# Altium PCB LRA_Driver.PcbDoc
Units mm, origin at the board's own origin, x right, y up, seen from the top; angles counter-clockwise.
Board outline 40 x 50 mm, 2 copper layers (Top Layer, Bottom Layer), stack 1.071 mm thick; 25 components, 19 nets, 108 pads, 18 vias.
Unrouted connection lines stored in the file: 2.
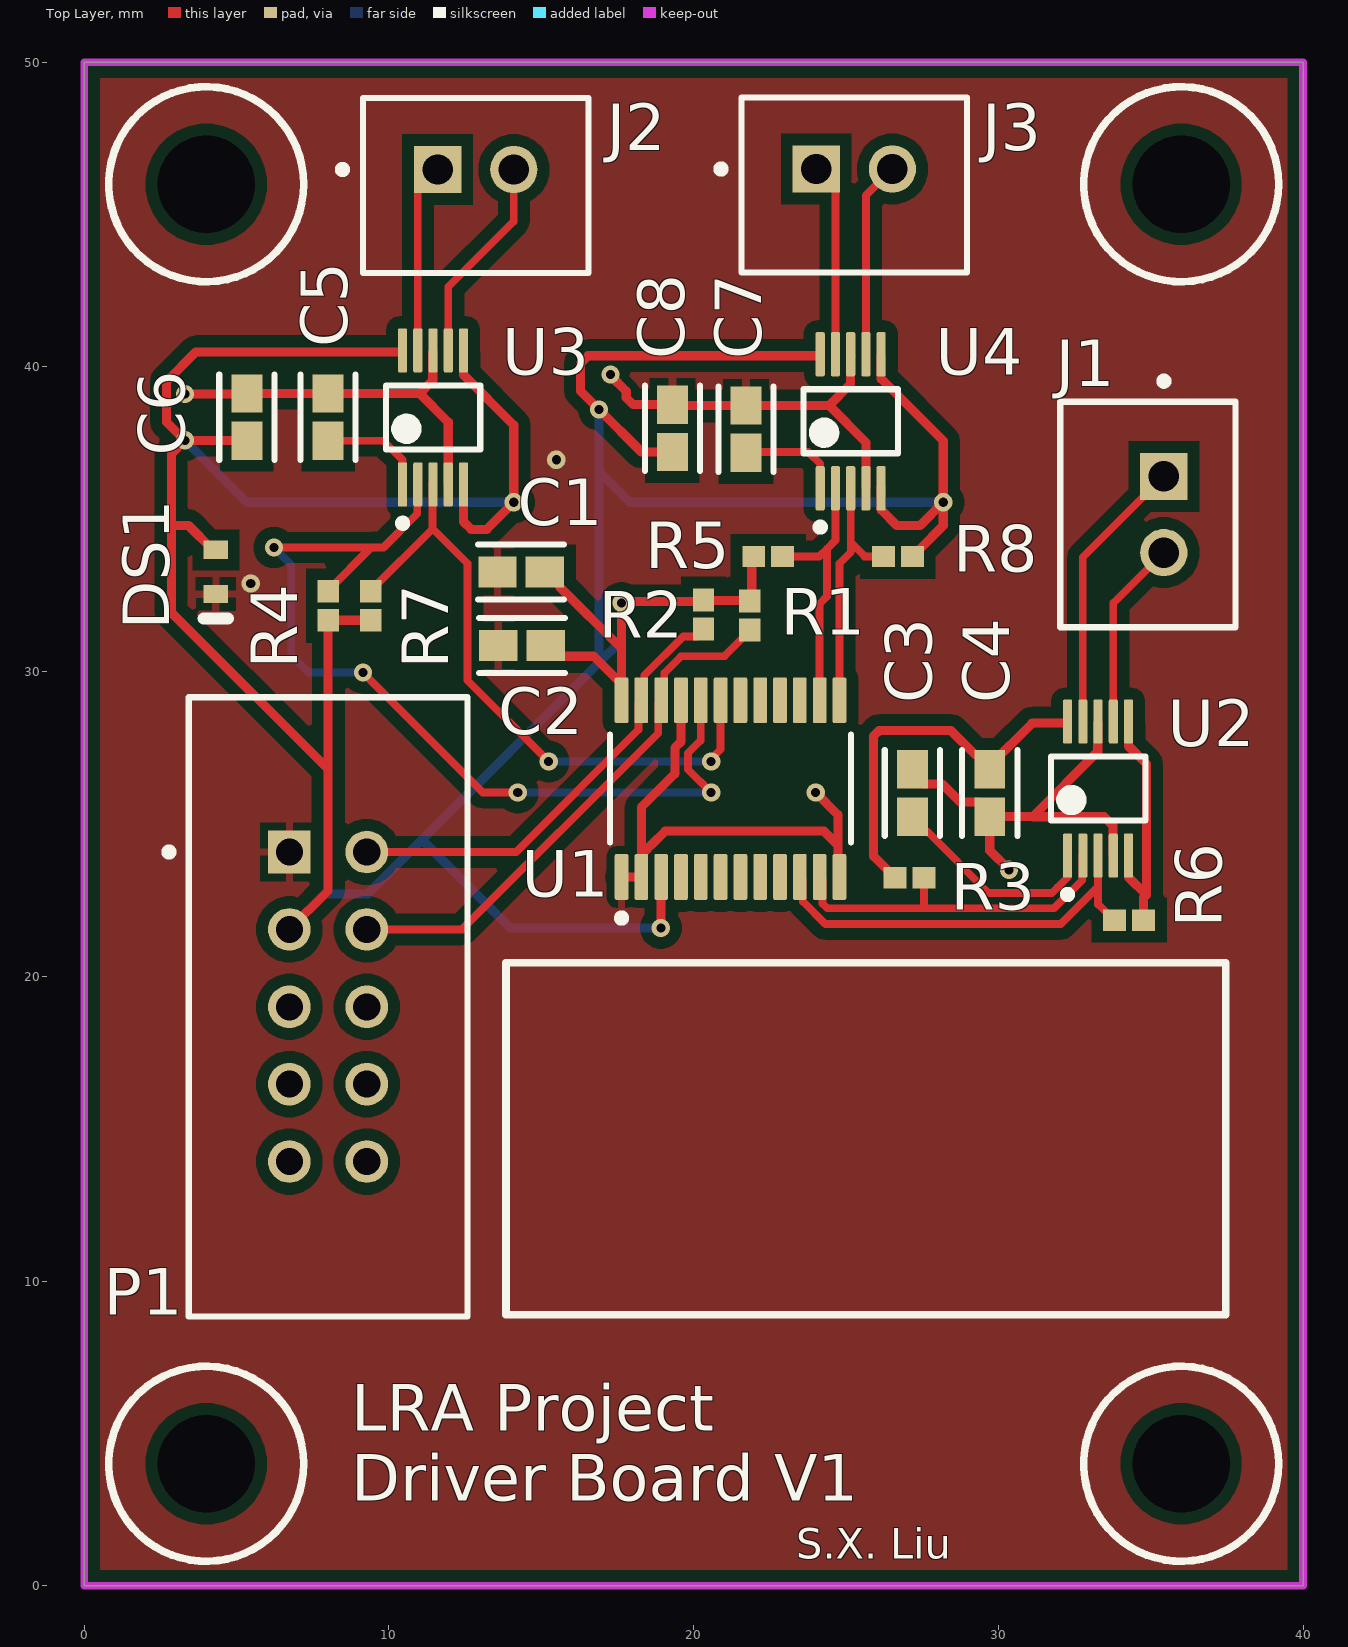
[diagram p0: Top Layer view]
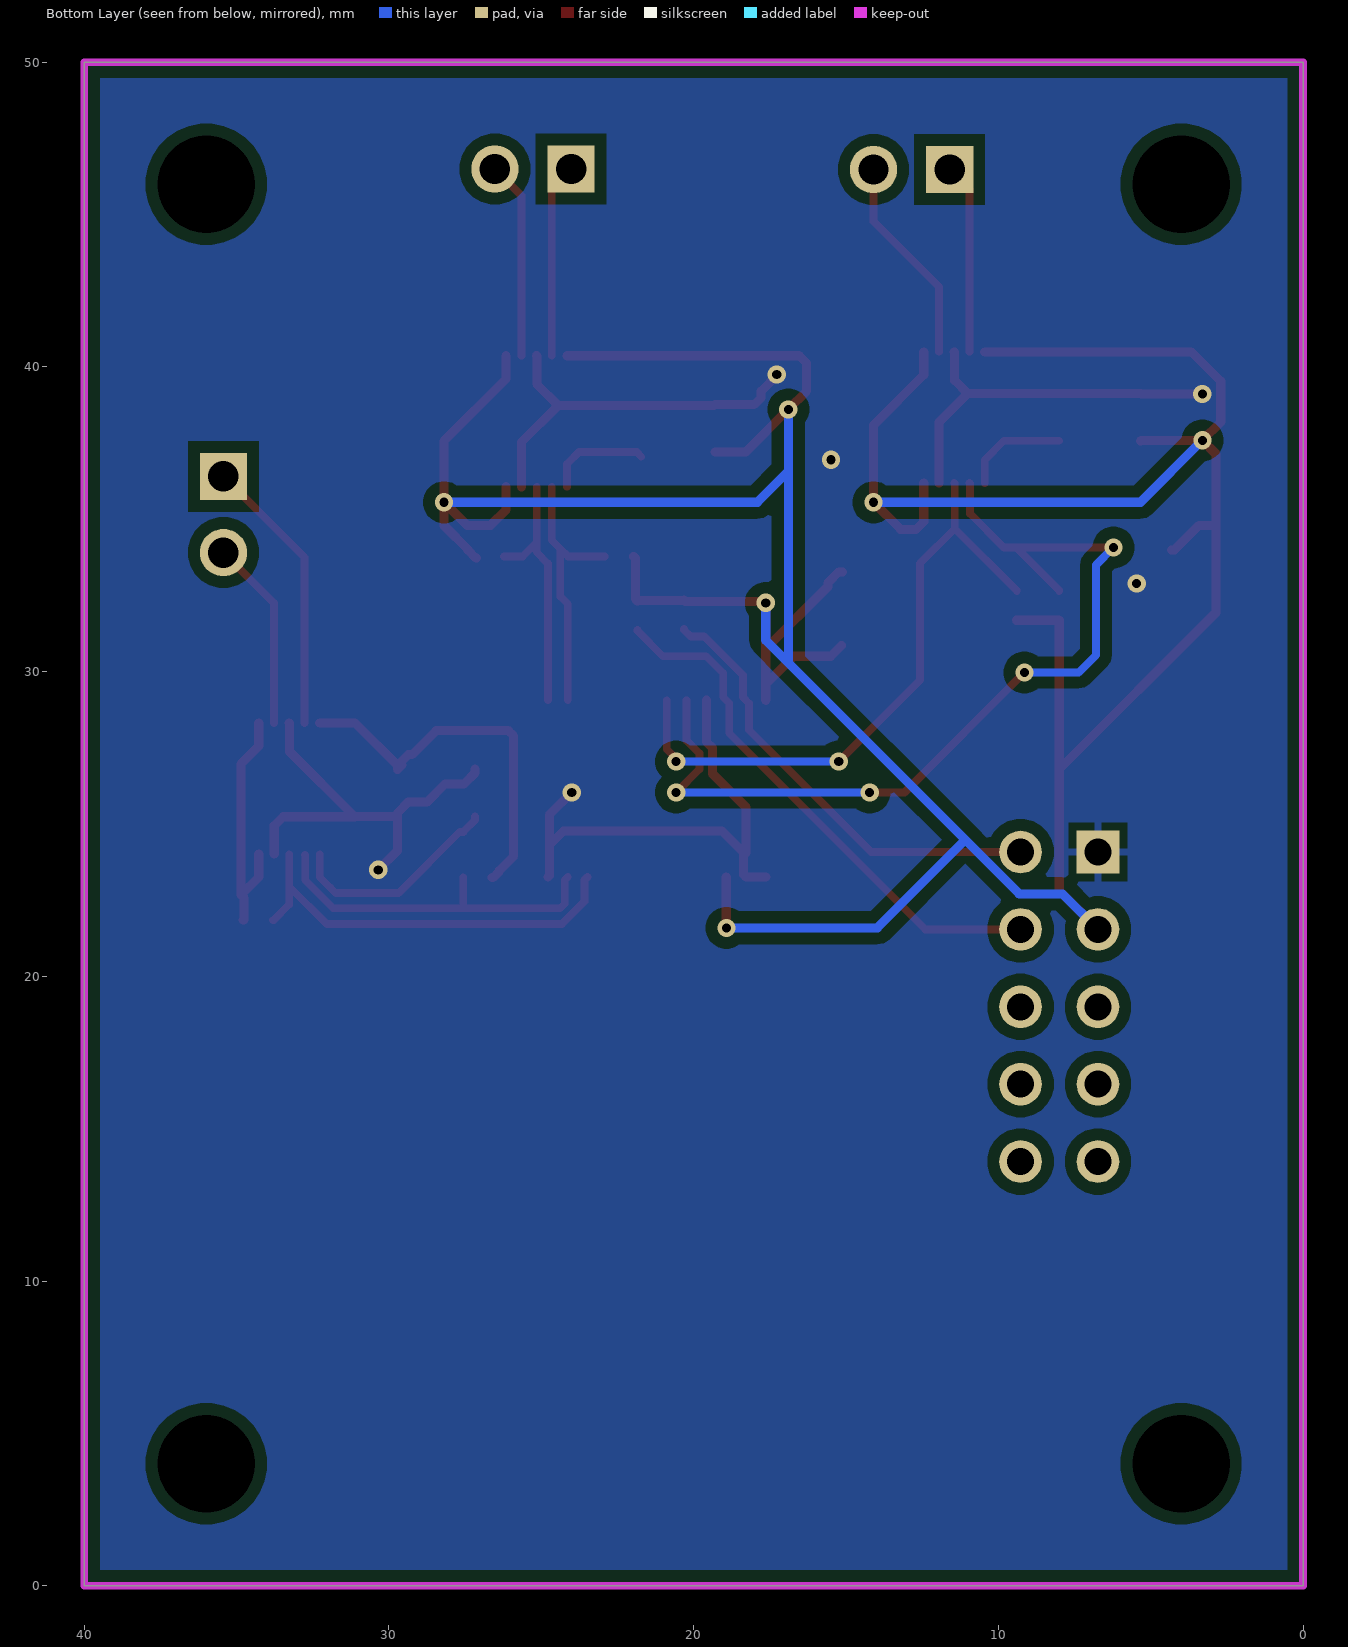
[diagram p1: Bottom Layer view, seen from below]
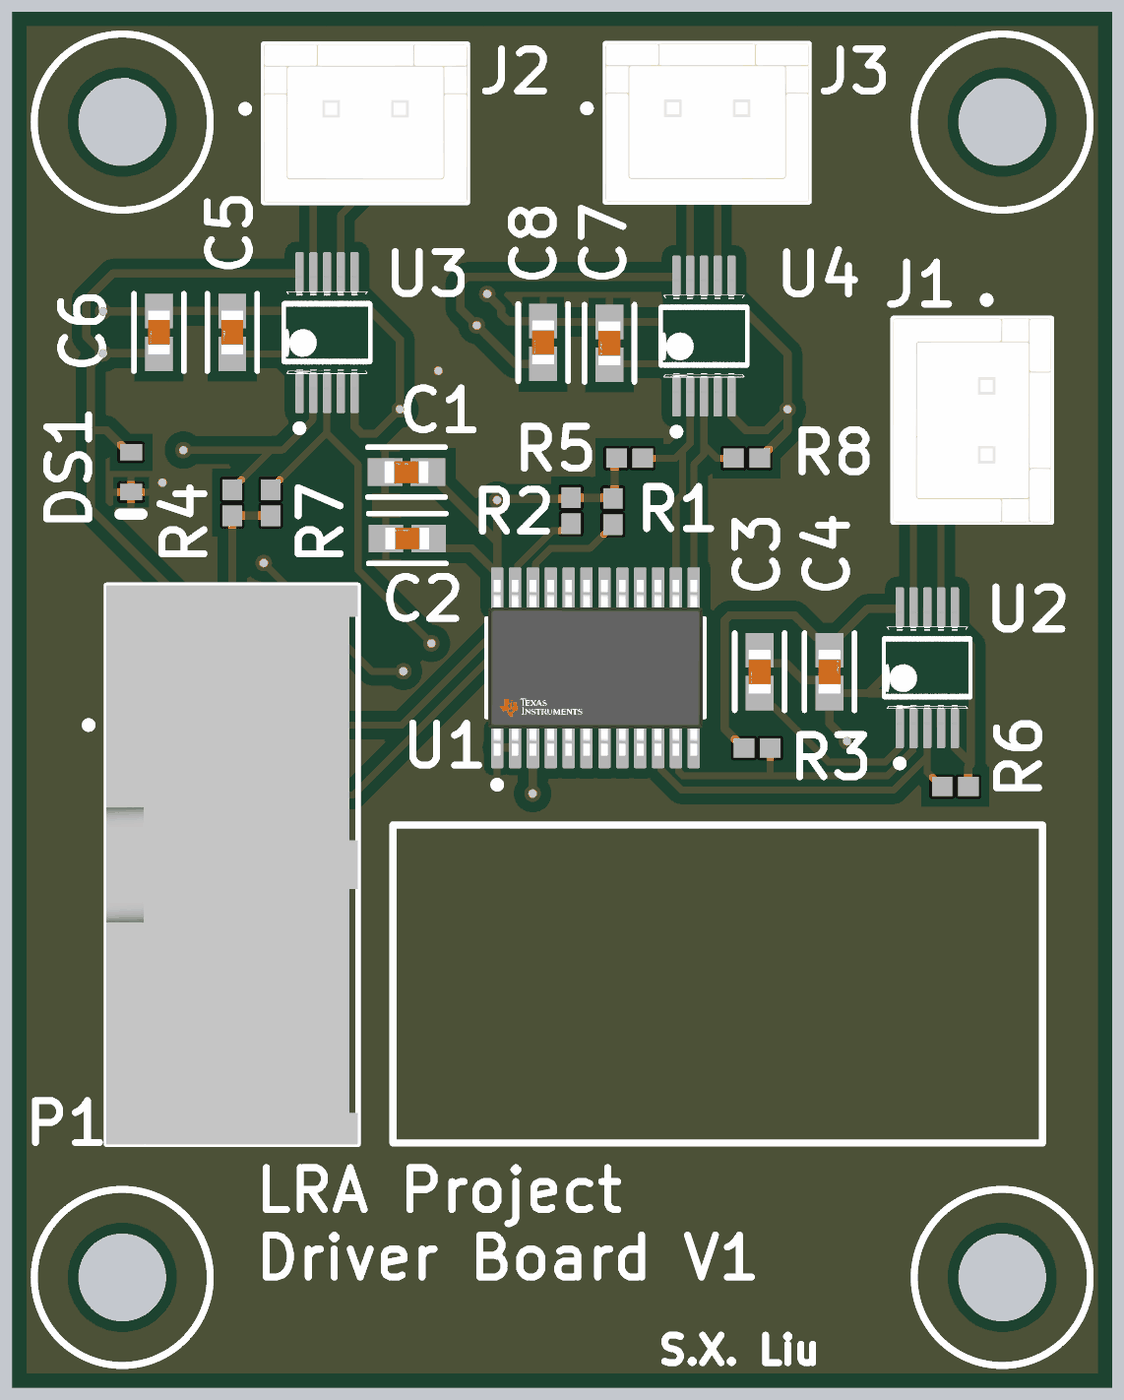
[diagram p2: 3D render of the assembled board from above, using the file's embedded part models]

## Layer stack, top to bottom
Top Solder: solder mask 0.0102, Solder Resist, Dk 3.5
Top Layer: signal copper 0.0356
Dielectric 1: dielectric 1, FR-4, Dk 4.8
Bottom Layer: signal copper 0.0356
Bottom Solder: solder mask 0.0102, Solder Resist, Dk 3.5

## Board outline
0,0 0,50 40,50 40,0

## Design rules (kind name [scope] priority, off if disabled: settings)
Clearance inploy&all [InPoly] p1: gap=0.381 ignorepadtopadclearanceinfootprint=FALSE
Clearance inpoly&isvia [InPoly vs IsVia] p2: gap=0.152 ignorepadtopadclearanceinfootprint=FALSE
Clearance inpoly&ispad [InPoly vs IsPad] p3: gap=0.152 ignorepadtopadclearanceinfootprint=FALSE
Clearance [All] p4: gap=0.152 ignorepadtopadclearanceinfootprint=FALSE
PolygonConnect PolygonConnect_vias [IsVia vs IsPoly] p1: connectstyle=Direct reliefconductorwidth=0.254 reliefentries=4 polygonreliefangle="90 Angle" airgapwidth=0.254
PolygonConnect [All] p2: connectstyle=Relief reliefconductorwidth=0.254 reliefentries=4 polygonreliefangle="90 Angle" airgapwidth=0.254
RoutingVias [All] p1: holewidth=0.3 width=0.6 viastyle="Through Hole" minholewidth=0.3 minwidth=0.6 maxholewidth=0.3 maxwidth=0.6
SolderMaskExpansion SolderMaskExpansion_vias [IsVia] p1: expansion=0.102 istentingtop=TRUE
SolderMaskExpansion [All] p2: expansion=0.102 istentingtop=FALSE
Width WidthPow [(InNet('VCC') OR InNet('GND'))] p1: maxlimit=0.3 minlimit=0.2 preferedwidth=0.3
Width [All] p2: maxlimit=0.254 minlimit=0.1 preferedwidth=0.254
30 further rules are at their usual default settings.

## Components (designator, comment, footprint, x,y, rotation, side; value= is the part's Value field where it differs from the comment)
C1 "10uF" FP-0603-L_1_6_0_1-W_0_8_0-IPC_A 14.336,33.274 r0 top
C2 "1uF" FP-0603-L_1_6_0_1-W_0_8_0-IPC_A 14.366,30.861 r0 top
C3 "1uF" FP-0603-L_1_6_0_1-W_0_8_0-IPC_A 27.178,26.02 r90 top
C4 "1uF" FP-0603-L_1_6_0_1-W_0_8_0-IPC_A 29.718,26.02 r270 top
C5 "1uF" FP-0603-L_1_6_0_1-W_0_8_0-IPC_A 8.001,38.354 r90 top
C6 "1uF" FP-0603-L_1_6_0_1-W_0_8_0-IPC_A 5.334,38.354 r90 top
C7 "1uF" FP-0603-L_1_6_0_1-W_0_8_0-IPC_A 21.717,37.958 r90 top
C8 "1uF" FP-0603-L_1_6_0_1-W_0_8_0-IPC_A 19.304,37.988 r90 top
DS1 "GTG1608SURC" VISH-TLMS1000_V 4.318,33.274 r270 top
J1 "B2B-XH-A(LF)(SN)" FP-B2B-XH-A_LF_SN-MFG 34.908,35.159 r270 top locked
J2 "B2B-XH-A(LF)(SN)" FP-B2B-XH-A_LF_SN-MFG 12.847,45.957 r0 top locked
J3 "B2B-XH-A(LF)(SN)" FP-B2B-XH-A_LF_SN-MFG 25.273,45.974 r0 top
P1 "5103309-1" TECO-5103309-1_V 8,19 r90 top
R1 "2kΩ" RESC1005X40X25ML10T10 21.844,31.844 r270 top
R2 "2kΩ" RESC1005X40X25ML10T10 20.32,31.877 r270 top
R3 "2kΩ" RESC1005X40X25ML10T10 27.084,23.241 r0 top
R4 "2kΩ" RESC1005X40X25ML10T10 8.001,32.164 r90 top
R5 "2kΩ" RESC1005X40X25ML10T10 22.446,33.782 r0 top
R6 "2kΩ" RESC1005X40X25ML10T10 34.29,21.844 r180 top
R7 "2kΩ" RESC1005X40X25ML10T10 9.398,32.164 r90 top
R8 "2kΩ" RESC1005X40X25ML10T10 26.703,33.782 r180 top
U1 "TCA9548APWR" FP-PW0024A-MFG 21.209,26.162 r90 top
U2 "DRV2605LDGSR" FP-DGS0010A-MFG 33.274,26.162 r90 top
U3 "DRV2605LDGSR" FP-DGS0010A-MFG 11.446,38.346 r90 top
U4 "DRV2605LDGSR" FP-DGS0010A-MFG 25.154,38.219 r90 top

## Footprints (in the part's own frame and the unit in brackets; to place one, negate y for a bottom-side part, rotate by r counter-clockwise, add the part's x,y. Pads: shape width x height; smd on the part's side, far side on the other; paste and mask are expansions set on the pad)
FP-0603-L_1_6_0_1-W_0_8_0-IPC_A [mm]
  rect 1.258x1.012 smd paste+0 mask+0: 1(-0.777,0) 2(0.777,0)
  silkscreen extent -1.41,-0.91 1.41,0.91, body extent -1.91,-1.01 1.91,1.01, height 0.25
FP-B2B-XH-A_LF_SN-MFG [mm]
  rect 1.55x1.55 hole 1 paste-1000 mask+0: 1(-1.25,0.525)
  round 1.55 hole 1 paste-1000 mask+0: 2(1.25,0.525)
  silkscreen extent -4.5,-2.87 3.7,2.88, body extent -3.8,-2.98 3.8,2.98, height 0.25
FP-DGS0010A-MFG [mm]
  rrect33% 1.45x0.3 smd paste+0 mask+0: 1(-2.2,1) 2(-2.2,0.5) 3(-2.2,0) 4(-2.2,-0.5) 5(-2.2,-1) 6(2.2,-1) 7(2.2,-0.5) 8(2.2,0) 9(2.2,0.5) 10(2.2,1)
  silkscreen extent -3.6,-1.55 1.05,1.55, body extent -3.03,-1.8 3.03,1.8, height 0.25
FP-PW0024A-MFG [mm]
  rrect22% 1.5x0.45 smd paste+0 mask+0: 1(-2.9,3.575) 2(-2.9,2.925) 3(-2.9,2.275) 4(-2.9,1.625) 5(-2.9,0.975) 6(-2.9,0.325) 7(-2.9,-0.325) 8(-2.9,-0.975) 9(-2.9,-1.625) 10(-2.9,-2.275) 11(-2.9,-2.925) 12(-2.9,-3.575) 13(2.9,-3.575) 14(2.9,-2.925) 15(2.9,-2.275) 16(2.9,-1.625) 17(2.9,-0.975) 18(2.9,-0.325) 19(2.9,0.325) 20(2.9,0.975) 21(2.9,1.625) 22(2.9,2.275) 23(2.9,2.925) 24(2.9,3.575)
  silkscreen extent -4.37,-3.95 1.78,3.95, body extent -3.75,-4.2 3.75,4.2, height 0.25
RESC1005X40X25ML10T10 [mm] "Chip Resistor, 2-Leads, Body 1.00x0.50mm, IPC Low Density"
  rect 0.75x0.7 smd: 1(-0.475,0) 2(0.475,0)
  body extent -0.55,-0.3 0.55,0.3, height 0.4
TECO-5103309-1_V [mm] "Male Header, 10-Leads, Body 20.32x9.144mm, Pitch 2.54mm"
  rect 1.4x1.4 hole 0.889: 1(5.08,1.27)
  round 1.4 hole 0.889: 2(5.08,-1.27) 3(2.54,1.27) 4(2.54,-1.27) 5(0,1.27) 6(0,-1.27) 7(-2.54,1.27) 8(-2.54,-1.27) 9(-5.08,1.27) 10(-5.08,-1.27)
  silkscreen extent -10.16,-4.57 10.16,5.35, body extent -10.16,-4.57 10.16,4.57, height 9.85
VISH-TLMS1000_V [mm] "SMD, 2-Leads, Body 0.8x1.6mm"
  rect 0.6x0.8 smd: 1(-0.725,0) 2(0.725,0)
  silkscreen extent 1.53,-0.4 1.53,0.4, body extent -0.8,-0.4 0.8,0.4, height 0.65

## Part data
C1: library part CMP-14477-000544-2, "0603", Capacitance=1uF, Case Code (Metric)=1608, Dielectric=X5R, Max Operating Temperature=85°C, Min Operating Temperature=-55°C, Package Quantity=1, Resistor Type=Ceramic, Tolerance=10%, Voltage Rating=16V, Case Code (Imperial)=0603, Case/Package=0603, Construction=Flat, Depth=0.8mm, Halogen Free="Halogen Free", Height=0.45mm, Lead Free="Lead Free", Length=1.6mm, Mount="Surface Mount", Number of Pins=2, Packaging="Tape and Reel", Radiation Hardening=No, RoHS Compliant=Yes, Series=M, Termination=SMD/SMT, Thickness=0.035inch, Voltage Rating (DC)=16V, Width=0.8mm
C2 C3 C4 C5 C6 C7 C8: library part CMP-14477-000544-2, "0603", Case Code (Metric)=1608, Dielectric=X5R, Max Operating Temperature=85°C, Min Operating Temperature=-55°C, Package Quantity=1, Resistor Type=Ceramic, Tolerance=10%, Voltage Rating=16V, Capacitance=1uF, Case Code (Imperial)=0603, Case/Package=0603, Construction=Flat, Depth=0.8mm, Halogen Free="Halogen Free", Height=0.45mm, Lead Free="Lead Free", Length=1.6mm, Mount="Surface Mount", Number of Pins=2, Packaging="Tape and Reel", Radiation Hardening=No, RoHS Compliant=Yes, Series=M, Termination=SMD/SMT, Thickness=0.035inch, Voltage Rating (DC)=16V, Width=0.8mm
DS1: library part CMP-2000-07254-1, "Low Current LED, 40 mW, 1.8 V, -40 to 100 degC, 2-Pin SMD (0603), RoHS, Tape and Reel", Forward Current If=2mA, Forward Voltage=1.8V, LED Colour=Red, Manufacturer=Vishay, Package Description="2-Pin Surface Mount Device, Body 1.6 x 0.8 mm", Package Reference=TLMS1000, Automotive Qualification Standard=AEC-Q100, Bulb Size=1.6mmx0.8mm, Datasheet URL=https://datasheet.ciiva.com/5798/1698881-5798337.pdf, Datasheet Version="Rev. 1.7, 02/2011", LED Mounting=SMD, Lens Shape=Rectangular, Luminous Intensity=4mcd, Manufacturer URL=http://www.vishay.com/, Mounting Technology=SurfaceMount, MSL=MSL2-1year, Packaging=CutTape, Product Range=-, SVHC=ToBeAdvised, Viewing Angle=80°, Wavelength Typ=636nm
J1 J2 J3: library part CMP-2000-05888-3, "CONN HEADER VERT 2POS 2.5MM", Color=Natural, Contact Resistance=20mR, Current Rating=3A, Housing Color=White, Insulation Resistance=1GR, Max Operating Temperature=85°C, Max Voltage Rating (AC)=250V, Min Operating Temperature=-25°C, Connector Type="Male Pin", Contact Material=Brass, Contact Plating=Tin, Contact Type="Male Pin", Depth=5.75mm, Fastening Type=Detent, Housing Material=Polyamide, Lead Free="Lead Free", Lead Pitch=2.5mm, Length=7.4mm, Max Current Rating=3A, Max Voltage Rating (DC)=250V, Mount="Through Hole", Number of Contacts=2, Number of Positions=2, Number of Rows=1, Orientation=Straight, Packaging=Bulk, Pitch=2.5mm, REACH SVHC="No SVHC", Series=XH, Termination=Solder, Voltage Rating=250V, Voltage Rating (AC)=250V, Wire/Cable Gauge=22AWG
P1: library part CMP-2000-07502-1, "Male Header, Pitch 2.54 mm, 2 x 5 Position, Height 9.855 mm, Tail Length 3.048 mm, -65 to 105 degC, RoHS, Tube", Colour=Black, Current Rating=1A, Flammability Rating=UL94V-0, Insulation Resistance=5GR, Manufacturer="TE Connectivity", Max Operating Temperature=105degC, Min Operating Temperature=-65degC, Package Description="Male Header, Pitch 2.54 mm, 2 x 5 Position, Height 9.855 mm, Tail Length 3.048 mm", Package Quantity=35, Board Standoff=Yes(With), Body Material=Thermoplastic, Connector System=Wire-to-Board, Connector Type=Header, Contact Gender=Male, Contact Material=CopperAlloy, Contact Mating Length=0.24inch, Contact Plating=Gold, Contact Shape=Square, Datasheet URL=http://www.te.com/commerce/DocumentDelivery/DDEController?Action=showdoc&DocId=Customer+Drawing%7F5103309%7FE1%7Fpdf%7FEnglish%7FENG_CD_5103309_E1.pdf%7F5103309-1, Datasheet Version="Rev. E1, 03/2011", Depth=9.14mm, ELV=Compliant, Gender=Male, Height=8.813mm, Housing Colour=Black, Housing Material=PBT, Lead Free=LeadFree, Length=0.8inch, Manufacturer URL=http://www.te.com/, Mating Alignment=Yes(With), Mating Connector Lock=No(Without), Mating Retention=No(Without), Max Current Rating=1A, Mount=ThroughHole, Mounting Technology=ThroughHole, Number of Contacts=10, Number of Positions=10, Number of Rows=2, Orientation=Straight, Package Reference=5103309-1, Packaging=Rail/Tube, Panel Mount Retention=No(Without), PCB Mount Alignment=No(Without), PCB Mount Retention=Without, PCB Mounting Orientation=Vertical, Pitch=2.54mm, REACH SVHC=NoSVHC, RoHSCompliant=True, Row Spacing=2.54mm, Shrouded=Yes(With), Shrouded End Dimension=3.81mm, Termination=ThroughHole, Termination Post Length=0.12inch
R1 R2 R3 R4 R5 R6 R7 R8: library part CMP-2002-05790-1, "0402", Manufacturer=Panasonic, Part Number=ERA-2AEB202X
U1: library part CMP-04892-000002-1, "IC I2C SW 8CH W/RESET 24TSSOP", Ambient Temperature Range High=+85°C, Ambient Temperature Range Low=-40°C, Manufacturer="Texas Instruments", Max Supply Voltage=5.5V, Min Supply Voltage=1.65V, Nominal Supply Current=2-50uA, Package=PW0024A, Temperature="-40°C to +85°C", Automotive=No, Category=IC, ComponentLink2Description=Datasheet, ComponentLink2URL=http://www.ti.com/lit/ds/symlink/tca9548a.pdf, Device Class L1="Integrated Circuits (ICs)", Device Class L2="Interface ICs", Device Class L3=Multiplexers, Digikey Description="IC I2C SW 8CH W/RESET 24TSSOP", Height=1.2mm, Interface=I2C,SMBus, Ipc Land Pattern Name=SOP65P640X120-24, Lead Free=Yes, Manufacturer Part Number=TCA9548APWR, Mouser Description="Low-Voltage 8-Channel I2C Switch With Reset 24-TSSOP -40 to 85", Mux Demux Ratio=1:8, Number Of Circuits=1, Octopart=https://octopart.com/tca9548apwr-texas+instruments-22266789, RoHS=TRUE, Standoff Height=0.05mm, Temperature Range High=+85°C, Temperature Range Low=-40°C
U2 U3 U4: library part CMP-04915-000060-1, "IC MOTOR DRIVER 2V-5.5V 10VSSOP", Case/Package=VSSOP, Max Operating Temperature=85°C, Min Operating Temperature=-40°C, Quiescent Current=500uA, Interface=I2C, Lead Free="Lead Free", Logic Function="AND GATE", Mount="Surface Mount", Packaging="Tape and Reel", RoHS Compliant=Yes

## Free pads (board coordinates)
  round 1.524 hole 3.2 unplated: 7(36,46) 8(4,46) 9(36,4) 10(4,4)

## Via types
v1: diameter 0.6, hole 0.3, Top Layer to Bottom Layer, tented both sides, 18 vias

## Nets (pads, with @x,y where several pads share a name; then routed paths per layer and width w, separated by ;. In a path a pad name is that pad's centre, name@x,y a point inside that pad or via, vN(x,y) a via of type N, cw(c..) or ccw(c..) an arc to the next point about the centre after c; other vN are vias at no path point)
GND: C1.1 C2.1 C3.2 C4.2 C5.2 C6.2 C7.2 C8.2 DS1.2 P1.1 U1.1 U1.2 U1.12 U1.21 U2.4 U2.8 U3.4 U3.8 U4.4 U4.8 | length 56.8
  Top Layer w0.3: v1(3.304,39.116) 5.319,39.116 C6.2 C5.2 11.005,39.131 ; U3.8@11.446,40.497 11.436,40.487 11.436,39.562 11.005,39.131 ; U3.4@11.946,36.195 11.946,38.191 11.005,39.131 ; v1(17.272,39.751) 17.272,39.722 17.788,39.206 17.788,38.994 18.017,38.765 C8.2 19.334,38.735 C7.2 24.444,38.735 ; U1.1 U1.2 18.359,23.337 18.359,24.057 18.407,24.105 18.407,24.108 18.613,24.314 18.616,24.314 19.067,24.765 24.277,24.765 24.734,24.308 ; 18.284,24.057 18.284,25.549 19.383,26.648 19.383,27.5 19.584,27.701 U1.21 ; v1(24.003,26.035) 24.734,25.304 24.734,24.308 ; U1.12 24.734,23.312 24.734,24.308 ; U4.8@25.154,40.37 25.144,40.36 25.144,39.435 24.444,38.735 ; U4.4@25.654,36.068 25.654,37.525 24.444,38.735 ; C3.2 27.178,26.674 27.534,26.318 28.15,26.318 28.746,25.722 29.362,25.722 29.718,25.365 C4.2 ; v1(30.353,23.495) 29.718,24.13 C4.2 ; U2.8@33.274,28.313 33.264,28.303 33.264,27.378 31.129,25.243 ; U2.4@33.774,24.011 33.764,24.021 33.764,24.946 33.471,25.239 31.132,25.239 31.129,25.243 ; C4.2 31.129,25.243
  other v1: 5.461,32.893 15.494,36.957
NetC3_1: C3.1 U2.1 | length 7.2
  Top Layer w0.254: C3.1 27.178,25.12 27.557,24.741 27.68,24.741 29.688,22.733 31.75,22.733 31.93,22.913 ; 31.93,22.914 32.274,23.258 U2.1@32.274,24.011
NetC5_1: C5.1 U3.1 | length 3.5
  Top Layer w0.254: C5.1 9.817,37.577 10.446,36.948 U3.1@10.446,36.195
NetC7_1: C7.1 U4.1 | length 3.4
  Top Layer w0.254: C7.1@21.717,37.058 21.87,37.211 23.764,37.211 24.154,36.821 U4.1@24.154,36.068
NetJ1_1: J1.1 U2.9 | length 9.2
  Top Layer w0.254: U2.9@32.774,28.313 32.774,33.75 J1.1
NetJ1_2: J1.2 U2.7 | length 6.3
  Top Layer w0.254: U2.7@33.774,28.313 33.774,32.25 J1.2
NetJ2_1: J2.1 U3.9 | length 6.3
  Top Layer w0.254: U3.9@10.946,40.497 10.946,45.831 J2.1
NetJ2_2: J2.2 U3.7 | length 6.9
  Top Layer w0.254: U3.7@11.946,40.497 11.946,42.628 14.097,44.779 J2.2
NetJ3_1: J3.1 U4.9 | length 6.4
  Top Layer w0.254: J3.1 24.654,45.868 U4.9@24.654,40.37
NetJ3_2: J3.2 U4.7 | length 6.5
  Top Layer w0.254: U4.7@25.654,40.37 25.654,45.63 J3.2
NetR3_2: R3.2 U1.11 U2.2 | length 11.7
  Top Layer w0.254: U1.11 24.232,23.164 24.232,22.384 24.383,22.233 25.096,22.233 25.098,22.235 27.559,22.235 ; R3.2 27.559,22.235 ; U2.2@32.756,23.993 32.751,23.988 32.751,23.159 31.827,22.235 27.559,22.235
NetR4_2: R4.2 U1.20 U3.2 | length 31.1
  Top Layer w0.254: v1(6.223,34.074) 9.411,34.074 ; R4.2 8.001,32.664 9.411,34.074 ; v1(9.144,29.972) 13.081,26.035 v1(14.224,26.035) ; U3.2@10.946,36.195 10.928,36.177 10.928,35.182 9.82,34.074 9.411,34.074 ; U1.20 20.234,27.744 19.812,27.322 19.812,26.797 v1(20.574,26.035)
  Bottom Layer w0.254: v1(6.223,34.074) 6.794,33.503 6.794,30.543 7.366,29.972 v1(9.144,29.972) ; v1(14.224,26.035) v1(20.574,26.035)
NetR5_2: R5.2 U1.14 U4.2 | length 8.8
  Top Layer w0.254: R5.2 24.126,33.782 24.38,34.036 ; U1.14 24.134,32.227 24.378,32.47 24.378,34.034 24.38,34.036 ; U4.2@24.654,36.068 24.654,34.31 24.38,34.036
NetR6_2: R6.2 U1.10 U2.3 | length 13.7
  Top Layer w0.254: U1.10 23.582,23.164 23.582,22.459 24.324,21.717 32.046,21.717 33.256,22.926 ; U2.3@33.274,24.011 33.274,22.926 33.274,22.36 33.79,21.844 R6.2
NetR7_2: R7.2 U1.19 U3.3 | length 21.1
  Top Layer w0.254: R7.2 9.398,32.664 11.43,34.696 ; U3.3@11.446,36.195 11.43,36.179 11.43,34.696 ; v1(15.24,27.051) 12.573,29.718 12.573,33.553 11.43,34.696 ; v1(20.574,27.051) 20.574,27.145 20.884,27.455 U1.19
  Bottom Layer w0.254: v1(15.24,27.051) v1(20.574,27.051)
NetR8_2: R8.2 U1.13 U4.3 | length 8.4
  Top Layer w0.254: U1.13 24.784,33.547 25.154,33.917 25.154,34.239 ; U4.3@25.154,36.068 25.154,34.239 ; R8.2 25.611,33.782 25.154,34.239
SCL_P: P1.4 R1.2 U1.22 | length 17.7
  Top Layer w0.254: P1.4 12.396,21.54 18.836,27.98 18.836,28.964 19.032,29.16 19.032,29.954 19.587,30.509 21.009,30.509 21.844,31.344 R1.2
SDA_P: P1.2 R2.2 U1.23 | length 15
  Top Layer w0.254: P1.2 14.174,24.08 18.186,28.092 18.186,28.964 18.382,29.16 18.382,29.879 19.657,31.154 20.097,31.154 20.32,31.377 R2.2
VCC: C1.2 C2.2 C4.1 C6.1 C8.1 DS1.1 P1.3 R1.1 R2.1 R3.1 R4.1 R5.1 R6.1 R7.1 R8.1 U1.3 U1.24 U2.5 U2.6 U2.10 U3.5 U3.6 U3.10 U4.5 U4.6 U4.10 | length 167.6
  Top Layer w0.3: DS1.1 4.218,33.999 3.419,34.798 2.856,34.798 ; C6.1 5.319,37.592 v1(3.302,37.592) ; P1.3 8.001,22.811 8.001,26.797 ; R7.1 R4.1 8.001,26.797 ; U3.10@10.446,40.497 3.667,40.497 2.702,39.532 2.702,38.192 v1(3.302,37.592) ; U3.5@12.446,36.195 12.446,34.925 12.7,34.671 13.208,34.671 v1(14.097,35.56) 14.097,38.092 12.446,39.743 U3.6@12.446,40.497 ; C1.2 15.236,33.274 15.592,32.918 15.592,32.795 17.634,30.753 ; C2.2 15.499,30.505 16.716,30.505 U1.24@17.634,29.587 ; U1.24 U1.24@17.634,29.587 ; v1(18.923,21.59) 18.929,21.596 18.929,23.256 U1.3 ; C8.1 18.288,37.211 v1(16.891,38.608) 16.291,39.208 16.291,40.127 16.534,40.37 U4.10@24.154,40.37 ; R5.1 21.907,33.718 21.907,32.382 R1.1 21.827,32.335 20.337,32.335 R2.1 20.273,32.305 17.681,32.305 v1(17.634,32.258) 17.634,30.753 ; U4.5@26.154,36.068 26.154,35.315 26.671,34.798 27.432,34.798 v1(28.194,35.56) ; U4.6@26.154,40.37 26.154,39.616 28.194,37.576 v1(28.194,35.56) ; R3.1 26.584,23.241 26.384,23.441 26.384,23.466 25.908,23.942 25.908,27.891 26.084,28.067 28.448,28.067 29.239,27.276 29.362,27.276 C4.1@29.718,26.92 ; R8.1@27.124,33.728 27.149,33.728 27.403,33.982 27.403,34.007 28.194,34.798 v1(28.194,35.56) ; C4.1@29.573,26.942 C4.1 C4.1@29.718,26.92 ; U2.10@32.274,28.313 31.111,28.313 C4.1@29.718,26.92 ; U2.5@34.274,24.011 34.274,23.258 34.859,22.673 ; U2.6@34.274,28.313 34.274,27.56 34.859,26.975 34.859,22.673 ; R6.1@34.79,21.844 R6.1 34.765,22.579 34.859,22.673 ; 2.856,34.798 2.856,31.942 8.001,26.797 ; 2.856,34.798 2.856,37.146 v1(3.302,37.592) ; U1.24@17.634,29.587 17.634,30.753
  Bottom Layer w0.3: v1(3.302,37.592) 5.334,35.56 v1(14.097,35.56) ; P1.3 7.898,22.708 9.312,22.708 11.082,24.478 ; v1(16.891,38.608) 16.891,36.576 ; v1(17.634,32.258) 17.634,31.03 16.891,30.287 ; v1(18.923,21.59) 13.97,21.59 11.082,24.478 ; v1(28.194,35.56) 17.907,35.56 16.891,36.576 ; 11.082,24.478 16.891,30.287 ; 16.891,30.287 16.891,36.576
pads on no net: P1.5 P1.6 P1.7 P1.8 P1.9 P1.10 U1.4 U1.5 U1.6 U1.7 U1.8 U1.9 U1.15 U1.16 U1.17 U1.18

## Polygon pours and split planes (outlines as drawn)
GND on Top Layer "GND_L01_P000" (solid, remove dead copper, pour order 0): 0,50.038 40.005,50.038 40.005,0 0,0
GND on Bottom Layer "GND_L02_P001" (solid, remove dead copper, pour order 1): 0,50.038 40.005,50.038 40.005,0 0,0

## Keep-outs
Keep-Out Layer:
  the board outline again, w0.254

## Silkscreen, mask and mechanical layers (free items; w line width, h text height)
Top Overlay:
  circle w0.254: c36,4 r3.2
  circle w0.254: c36,46 r3.2
  circle w0.254: c4,46 r3.2
  circle w0.254: c4,4 r3.2
  lines w0.254: 13.843,8.89 13.843,20.447 37.465,20.447 37.465,8.89 13.843,8.89
  text "LRA Project / Driver Board V1" at 8.763,2.794 h1.52
  text "S.X. Liu" at 23.368,0.889 h1